# Altium PCB 5V SMPS 2.0.PcbDoc
Units mm, origin at the board's own origin, x right, y up, seen from the top; angles counter-clockwise.
Board outline 75.33 x 30.25 mm, 2 copper layers (Top Side, Bottom Layer), stack 0.979 mm thick; 28 components, 0 nets, 61 pads, 0 vias.
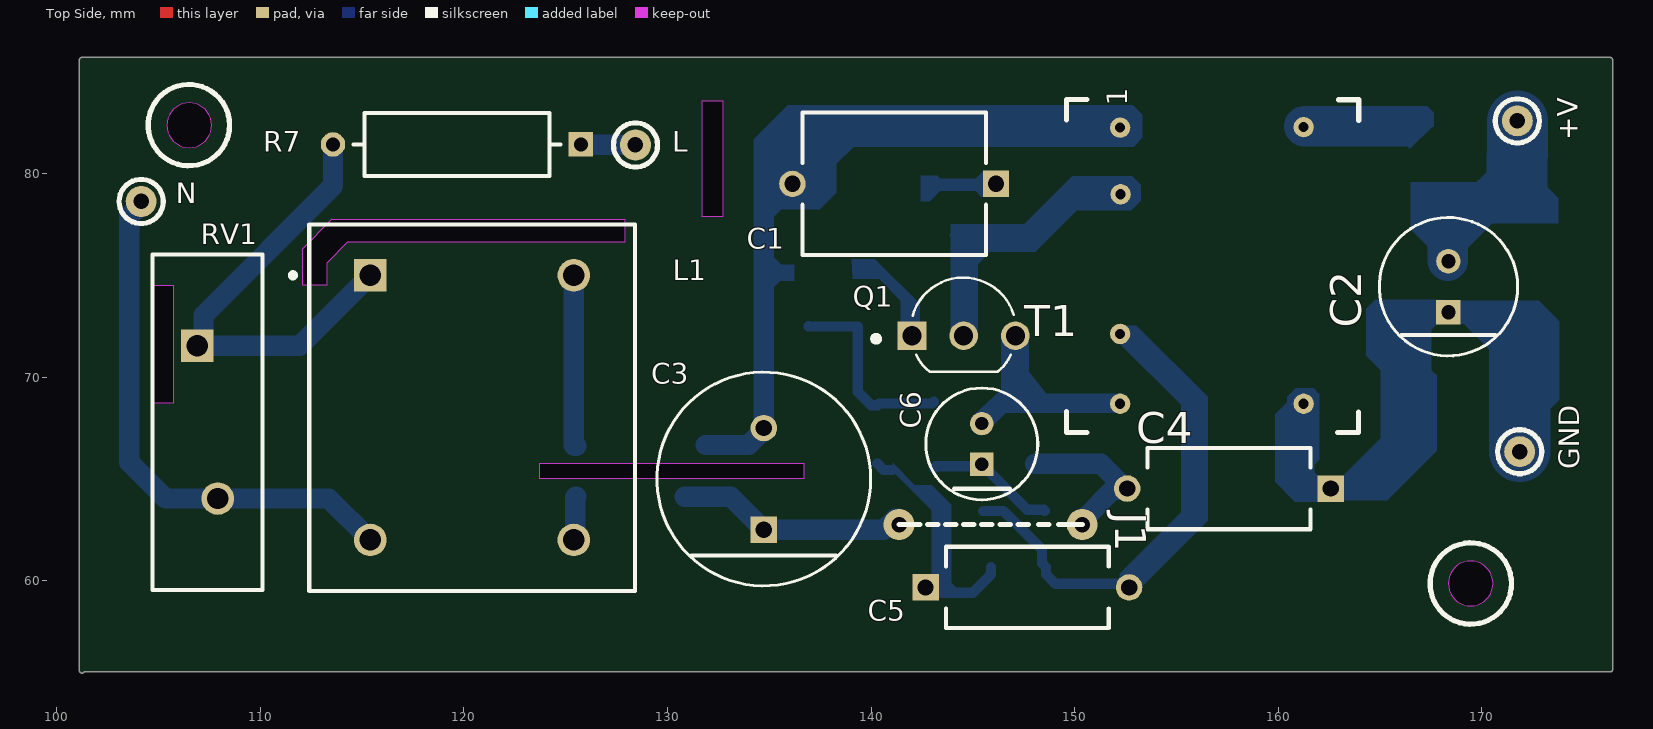
[diagram p0: Top Side view]
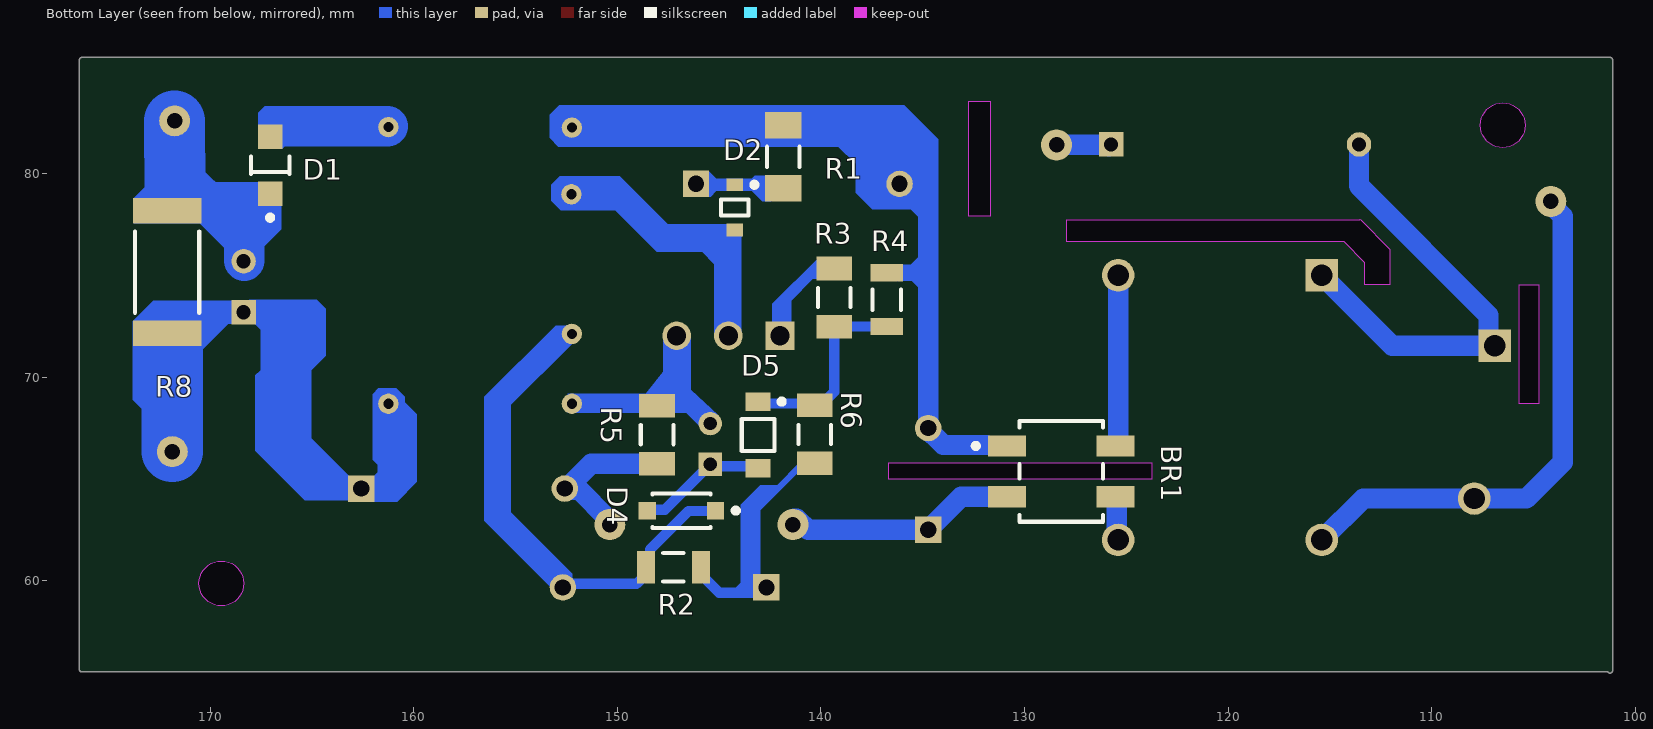
[diagram p1: Bottom Layer view, seen from below]

## Layer stack, top to bottom
Top Solder: solder mask 0.0102, Solder Resist, Dk 3.5
Top Side: signal copper (thickness not stored)
Dielectric 1: dielectric 0.9441, FR-4, Dk 4.8
Bottom Layer: signal copper 0.035
Bottom Solder: solder mask 0.0102, Solder Resist, Dk 3.5

## Board outline
101.103,55.597 101.103,85.597 cw(c101.23,85.597) 101.23,85.725 176.23,85.724 176.27,85.718 cw(c176.309,85.597) 176.437,85.597 176.437,55.658 cw(c176.309,55.658) 176.309,55.531 101.339,55.531 cw(c101.23,55.597)
cut-out: 168.358,59.877 ccw(c169.458,59.877) 169.458,58.777 ccw(c169.458,59.877) 170.558,59.877 ccw(c169.458,59.877) 169.458,60.977 ccw(c169.458,59.877)
cut-out: 105.401,82.387 ccw(c106.501,82.387) 106.501,81.287 ccw(c106.501,82.387) 107.601,82.387 ccw(c106.501,82.387) 106.501,83.487 ccw(c106.501,82.387)
cut-out: 123.721,65.787 136.687,65.787 136.687,65.018 123.721,65.018
cut-out: 127.919,77.75 113.522,77.75 113.51,77.762 112.052,76.305 112.052,74.558 113.273,74.558 113.273,75.645 114.282,76.654 127.919,76.654
cut-out: 104.703,68.738 104.703,74.536 105.708,74.536 105.708,68.728 104.704,68.728
cut-out: 131.69,83.576 131.69,77.924 132.732,77.924 132.732,83.576

## Components (designator, comment, footprint, x,y, rotation, side; value= is the part's Value field where it differs from the comment)
+V "L" Wire_point_0.5mm 171.755,82.605 r90 top
BR1 "MB10F-13" FP-MBF-MFG 128.191,65.382 r180 bottom value=8pF
C1 "2.2nF/1KV" FP-DE6_D9_T7_F10_d0_6-0_0-MFG 141.14,79.507 r180 top
C2 "220uF / 16V" FP-RAD-TH-D_6_3_0_5-L_11-MFG 168.367,74.456 r90 top
C3 "4.7uF/450V" FP-RAD-TH-D_10_0_5-L_20_2-MFG 134.731,65.009 r90 top
C4 "1.5nF / 1KV" FP-DE1_D8_T4_F10_d0_6-0_0-MFG 157.584,64.54 r180 top
C5 "1.5nF / 1KV" FP-DE1_D8_T4_F10_d0_6-0_0-MFG 147.679,59.68 r0 top
C6 "22uF / 25V" FP-RAD-TH-D_5_0_5-L_7_1-F-MFG 145.441,66.73 r90 top
D1 "PMEG3010BER,115" FP-SOD123W-MFG 167.063,80.421 r90 bottom value=170pF
D2 "M7" ONSC-SOD-323-2-477-02_V 144.236,78.35 r270 bottom
D4 "1N4148" FP-S8-V-3910_01-001-MFG 146.859,63.454 r0 bottom
D5 "9V1" ONSC-SOD-123-2-425-04_V 143.091,67.173 r270 bottom
GND "L" Wire_point_0.5mm 171.87,66.35 r90 top
J1 "7 mm long jumper" J? 141.376,62.768 r0 top
L "L" Wire_point_0.5mm 128.427,81.42 r90 top
L1 "1.8mH" FP-PLA10A_sw-MFG 120.397,68.516 r270 top
N "L" Wire_point_0.5mm 104.142,78.644 r270 top
Q1 "HLB120A" HLB12A 144.55,72.897 r0 top
R1 "150Ω" RESC3216X60X45ML10T20 141.855,80.832 r90 bottom
R2 "5.6kΩ" RESC3216X60X45LL10T20 147.247,60.671 r0 bottom
R3 "33Ω" FP-CRCW1206-e3-IPC_B 139.343,73.924 r270 bottom
R4 "1MΩ" RESC3116X65X40LL10T20 136.759,73.822 r90 bottom
R5 "33Ω" FP-CRCW1206-e3-IPC_B 148.055,67.189 r270 bottom
R6 "33Ω" FP-CRCW1206-e3-IPC_B 140.307,67.198 r90 bottom
R7 "10E" FP-CFR50J2K2-MFG 119.655,81.444 r180 top
R8 "1MΩ" RESC2512(6432)_N 172.119,75.177 r90 bottom value="1000000.00 Ohm"
RV1 "14D471K" FP-MOV-14D471K-MFG 107.404,67.798 r270 top value=516pF
T1 "3 core EE-16/5/6" Transformer 156.758,75.464 r0 top

## Footprints (in the part's own frame and the unit in brackets; to place one, negate y for a bottom-side part, rotate by r counter-clockwise, add the part's x,y. Pads: shape width x height; smd on the part's side, far side on the other; paste and mask are expansions set on the pad)
FP-CFR50J2K2-MFG [mm]
  rect 1.2x1.2 hole 0.7 paste-2539.97 mask+0: 1(-6.09,0)
  round 1.2 hole 0.7 paste-2539.97 mask+0: 2(6.09,0)
  silkscreen extent -5.09,-1.55 5.09,1.55, body extent -6.79,-1.65 6.79,1.65, height 0.25
FP-CRCW1206-e3-IPC_B [mm]
  rect 1.156x1.758 smd paste+0 mask+0: 1(-1.426,0) 2(1.426,0)
  silkscreen extent -0.47,-0.8 0.47,0.8, body extent -1.6,-0.8 1.6,0.8, height 0.6
FP-DE1_D8_T4_F10_d0_6-0_0-MFG [mm]
  rect 1.3x1.3 hole 0.8 paste-2539.97 mask+0: 1(-5,0)
  round 1.3 hole 0.8 paste-2539.97 mask+0: 2(5,0)
  silkscreen extent -4,-2 4,2, body extent -5.75,-2.1 5.75,2.1, height 0.25
FP-DE6_D9_T7_F10_d0_6-0_0-MFG [mm]
  rect 1.3x1.3 hole 0.8 paste-2539.97 mask+0: 1(-5,0)
  round 1.3 hole 0.8 paste-2539.97 mask+0: 2(5,0)
  silkscreen extent -4.5,-3.5 4.5,3.5, body extent -5.75,-3.6 5.75,3.6, height 0.25
FP-MBF-MFG [mm]
  rect 1.875x1.05 smd paste+0 mask+0: 1(-2.662,1.25) 2(2.662,1.25) 3(-2.662,-1.25) 4(2.662,-1.25)
  silkscreen extent -4.33,-2.47 2.05,2.47, body extent -3.35,-2.36 3.35,2.36, height 1.8
FP-MOV-14D471K-MFG [mm]
  rect 1.6x1.6 hole 1.05 paste-2539.97 mask+0: 1(-3.75,-0.5)
  round 1.6 hole 1.05 paste-2539.97 mask+0: 2(3.75,0.5)
  silkscreen extent -8.25,-2.7 8.25,2.7, body extent -8.35,-2.8 8.35,2.8, height 0.25
FP-PLA10A_sw-MFG [mm]
  rect 1.6x1.6 hole 1.05 paste-2539.97 mask+0: 1(-6.5,-5)
  round 1.6 hole 1.05 paste-2539.97 mask+0: 2(-6.5,5) 3(6.5,5) 4(6.5,-5)
  silkscreen extent -9,-8.92 9,8, body extent -9.1,-8.1 9.1,8.1, height 0.25
FP-RAD-TH-D_5_0_5-L_7_1-F-MFG [mm]
  rect 1.15x1.15 hole 0.65 paste-2539.97 mask+0: 1(-1,0)
  round 1.15 hole 0.65 paste-2539.97 mask+0: 2(1,0)
  silkscreen extent -2.75,-2.75 2.75,2.75, body extent -2.85,-2.85 2.85,2.85, height 0.25
FP-RAD-TH-D_6_3_0_5-L_11-MFG [mm]
  rect 1.2x1.2 hole 0.7 paste-2539.97 mask+0: 1(-1.25,0)
  round 1.2 hole 0.7 paste-2539.97 mask+0: 2(1.25,0)
  silkscreen extent -3.4,-3.4 3.4,3.4, body extent -3.5,-3.5 3.5,3.5, height 0.25
FP-RAD-TH-D_10_0_5-L_20_2-MFG [mm]
  rect 1.3x1.3 hole 0.8 paste-2539.97 mask+0: 1(-2.5,0)
  round 1.3 hole 0.8 paste-2539.97 mask+0: 2(2.5,0)
  silkscreen extent -5.25,-5.25 5.25,5.25, body extent -5.35,-5.35 5.35,5.35, height 0.25
FP-S8-V-3910_01-001-MFG [mm]
  rect 0.85x0.85 smd paste+0 mask+0: 1(-1.675,0) 2(1.675,0)
  silkscreen extent -2.8,-0.85 1.43,0.85, body extent -1.85,-0.77 1.85,0.77, height 1.35
FP-SOD123W-MFG [mm]
  rect 1.2x1.2 smd paste-1000 mask+0: 1(-1.4,0) 2(1.4,0)
  silkscreen extent -2.7,-0.95 0.43,0.95, body extent -1.75,-0.85 1.75,0.85, height 1.1
HLB12A [mm]
  rect 1.41x1.41 / inner round 1.41 / far side rect 1.41x1.41 hole 0.94: 1(-2.54,-0.853)
  round 1.41 hole 0.94: 2(0,-0.853) 3(2.54,-0.853)
  silkscreen extent -4.44,-2.62 2.47,2.01, body extent -2.83,-2.22 2.83,1.4, height 8.77
J? [mil]
  round 60 hole 30: 1(0,0) 2(354.33,0)
  silkscreen extent 0,0 354,0
ONSC-SOD-123-2-425-04_V [mm] "SOD, 2-Leads, Body 2.69x1.6mm"
  rect 0.91x1.22 smd: 1(-1.635,0) 2(1.635,0)
  silkscreen extent -1.76,-0.8 0.78,1.28, body extent -1.35,-0.8 1.35,0.8, height 1.35
ONSC-SOD-323-2-477-02_V [mm] "SOD, 2-Leads, Body 1.7x1.25mm"
  rect 0.63x0.83 smd: 1(-1.115,0) 2(1.115,0)
  silkscreen extent -1.24,-0.67 0.4,1.09, body extent -0.85,-0.63 0.85,0.63, height 1.06
RESC2512(6432)_N [mm] "Chip Resistor, Body 6.4x3.2mm, IPC Medium Density"
  rect 1.25x3.35 smd: 1(-3,0) 2(3,0)
  silkscreen extent -2,-1.57 2,1.58, body extent -3.25,-1.7 3.25,1.7, height 0.75
RESC3116X65X40LL10T20 [mm] "Chip Resistor, 2-Leads, Body 3.10x1.60mm, IPC High Density"
  rect 0.85x1.6 smd: 1(-1.325,0) 2(1.325,0)
  silkscreen extent -0.5,-0.7 0.5,0.7, body extent -1.6,-0.85 1.6,0.85, height 0.65
RESC3216X60X45LL10T20 [mm] "Chip Resistor, 2-Leads, Body 3.20x1.60mm, IPC High Density"
  rect 0.9x1.6 smd: 1(-1.35,0) 2(1.35,0)
  silkscreen extent -0.5,-0.7 0.5,0.7, body extent -1.65,-0.85 1.65,0.85, height 0.6
RESC3216X60X45ML10T20 [mm] "Chip Resistor, 2-Leads, Body 3.20x1.60mm, IPC Low Density"
  rect 1.3x1.8 smd: 1(-1.55,0) 2(1.55,0)
  silkscreen extent -0.5,-0.8 0.5,0.8, body extent -1.65,-0.85 1.65,0.85, height 0.6
Transformer [mm]
  round 1 hole 0.5: 1(-4.521,6.807) 2(-4.496,3.531) 3(-4.521,-3.327) 4(-4.521,-6.756) 5(4.496,6.833) 6(4.496,-6.756)
  silkscreen extent -7.16,-8.17 7.21,8.2, body extent -6.5,-7.52 6.5,7.5, height 13
Wire_point_0.5mm [mil]
  round 60 hole 30: 1(0,0)
  silkscreen extent -43,-43 43,43

## Part data
+V GND L N: library part Wire_point_0.5mm
BR1: library part CMP-12791-000022-1, "BRIDGE RECT 1PHASE 1KV 800MA MBF", Capacitance=8pF, Forward Current=0.5A, Manufacturer="Diodes Incorporated", Max Junction Temp=+150°C, Max Repetitive Reverse Voltage=1000V, Max Surge Forward Current=30A, Package=MBF, Peak Reverse Current=0.2uA, Temperature="-55°C to +150°C", Temperature Range Low=-55°C, Automotive=No, Category=Diode, ComponentLink2Description=Datasheet, ComponentLink2URL=https://www.diodes.com/assets/Datasheets/MB10F.pdf, Device Class L1="Discrete Semiconductors", Device Class L2=Diodes, Device Class L3="Rectifier Diodes", Digikey Description="BRIDGE RECT 1PHASE 1KV 800MA MBF", Footprint Url=https://www.diodes.com/assets/Package-Files/MBF.pdf, Height=1.8mm, Lead Free=Yes, Manufacturer Part Number=MB10F-13, Mouser Description="Diode Rectifier Bridge Single 1000V 0.8A 4-Pin Case MBF T/R", Octopart=https://octopart.com/mb10f-13-diodes+inc.-82160020, Reverse Voltage=1000V, RoHS=TRUE, Temperature Range High=+150°C
C1: library part CMP-00260-135708671-1, "DE6E3KJ222MN4A Ceramic Suppression Capacitor, 2200 pF, ± 20%, X1 / Y2, 440 V, 300 V, Radial Leaded", Capacitance=2.2nF, Case/Package=Radial, Max Operating Temperature=125°C, Min Operating Temperature=-40°C, Tolerance=20%, Voltage Rating=1kV, Height=12mm, Lifecycle Status=Production, Material=Ceramic, NexarPartId=135708671
C2: library part CMP-05427-000685-1, "Aluminum Electrolytic Capacitors (Radial Lead Type) AEC-Q200 Qualified 220uF ±20% 16V", Capacitance=220uF, Case/Package=Radial, Max Operating Temperature=105°C, Min Operating Temperature=-55°C, Package Quantity=2000, Ripple Current=180mA, Tolerance=20%, Voltage Rating=16V, Diameter=6.3mm, Height=11.2mm, Height - Seated (Max)=0.48inch, Lead Diameter=0.5mm, Lead Pitch=5mm, Lead/Base Style=Straight, Length=11.2mm, Life (Hours)=1000Hour, Mount="Through Hole", Packaging="Ammo Pack", Radiation Hardening=No, RoHS Compliant=Yes, Series=NHG, Termination=Radial, Voltage Rating (DC)=16V
C3: library part CMP-05427-000868-1, "ECA2WHG4R7 Aluminum Electrolytic Capacitors (Radial Lead Type) 4.7uF ±20% 450V", Capacitance=4.7uF, Case/Package=Radial, Dielectric Material=Aluminium, Leakage Current=10uA, Max Operating Temperature=105°C, Min Operating Temperature=-25°C, Package Quantity=200, Ripple Current=49mA, Tolerance=20%, Voltage=450V, Construction=RADIAL, Contact Plating=Tin, Diameter=10mm, Dissipation Factor=0.24%, Height=20mm, Height - Seated (Max)=0.866inch, Lead Diameter=0.6mm, Lead Free="Lead Free", Lead Pitch=5mm, Lead/Base Style=Straight, Length=20mm, Life (Hours)=2000Hour, Mount="Through Hole", Number of Pins=2, Packaging=Bulk, Radiation Hardening=No, REACH SVHC="No SVHC", Ripple Current (AC)=49mA, RoHS Compliant=Yes, Series=NHG, Termination=Radial, Voltage Rating=450V, Voltage Rating (DC)=450V
C4 C5: library part CMP-06035-063098-1, "Safety Standard Certified Lead Type Disc Ceramic Capacitors for General Purpose, 1500pF ±20%, E(JIS), 400Vac(r.m.s.), +20/-55%, Radial"
C6: library part CMP-05427-001207-1, "Aluminum Electrolytic Capacitors (Radial Lead Type) 22uF ±20% 25V", Capacitance=22uF, Case/Package=Radial, Max Operating Temperature=85°C, Min Operating Temperature=-40°C, Package Quantity=2000, Ripple Current=55mA, Tolerance=20%, Voltage Rating=25V, Diameter=5mm, Height=7mm, Height - Seated (Max)=0.315inch, Lead Pitch=2.5mm, Length=7mm, Life (Hours)=1000Hour, Mount="Through Hole", Packaging="Ammo Pack", Radiation Hardening=No, RoHS Compliant=Yes, Series=KA, Termination=Radial, Voltage Rating (DC)=25V
D1: library part CMP-14398-000004-1, "DIODE SCHOTTKY 30V 1A SOD123W", Ambient Temperature Range High=+150°C, Ambient Temperature Range Low=-55°C, Capacitance=170pF, Forward Current=1A, Manufacturer=Nexperia, Max Surge Forward Current=50A, Package=SOD123W, Peak Reverse Current=15uA, Reverse Voltage=30V, Temperature="to +150°C", Automotive=Yes, Automotive Grade="Grade 0", Category=Diode, ComponentLink2Description=Datasheet, ComponentLink2URL=https://assets.nexperia.com/documents/data-sheet/PMEG3010BER.pdf, Device Class L1="Discrete Semiconductors", Device Class L2=Diodes, Device Class L3="Schottky Diodes", Digikey Description="DIODE SCHOTTKY 30V 1A SOD123W", Footprint Url=https://assets.nexperia.com/documents/outline-drawing/SOD123W.pdf, Height=1.1mm, Lead Free=Yes, Manufacturer Part Number=PMEG3010BER,115, Max Junction Temp=+150°C, Octopart=https://octopart.com/pmeg3010ber%2C115-nexperia-78741454, RoHS=TRUE, Temperature Range High=+150°C
D2: library part CMP-1054-00003-1, "1A Vf1000V  Diode SOD-323, Pb-Free, Tape and Reel", Manufacturer="On Semiconductor", PartNumber=MMDL914T3G, ComponentLink1Description="Manufacturer URL", ComponentLink1URL=http://www.onsemi.com/, ComponentLink2Description=Datasheet, ComponentLink2URL=http://www.onsemi.com/pub_link/Collateral/MMDL914T1-D.PDF, ComponentLink3Description="Package Specification", ComponentLink3URL=http://www.onsemi.com/pub_link/Collateral/477-02.PDF.1, Configuration=Single, DatasheetVersion="Rev. 9", IF Max (A)=0.2, Mounting Technology="Surface Mount", PackageDescription="2-Pin SOD, Body 1.7 x 1.25 mm", PackageReference=SOD-323-2-477-02, PackageVersion="Rev. H, 03/2007", Packing="Tape and Reel", RoHS=TRUE, trr Max (ns)=4
D4: library part CMP-00030-46456310-1, "1N4148W-G3-08 Rectifier Diode, 1 Phase, 1 Element, 0.15A, 100V V(RRM), Silicon", Average Rectified Current=150mA, Case/Package=SOD, Forward Voltage=1.2V, Max Operating Temperature=150°C, Max Repetitive Reverse Voltage (Vrrm)=100V, Max Reverse Voltage (DC)=75V, Min Operating Temperature=-55°C, Peak Non-Repetitive Surge Current=500mA, Contact Plating=Tin, Element Configuration=Single, Forward Current=150mA, Mount="Surface Mount", NexarPartId=46456310, Number of Pins=2, Reverse Recovery Time=4ns, RoHS=Compliant, Schedule B="8541100070, 8541100070", Weight=9.412042mg
D5: library part CMP-1060-00344-1, "SZMMSZ9V1T1G Zener Voltage Regulator, 500 mW, 2-Pin SOD-123, Pb-Free, Tape and Reel", Manufacturer="On Semiconductor", PartNumber=SZMMSZ9V1T1G, ComponentLink1Description="Manufacturer URL", ComponentLink1URL=http://www.onsemi.com/, ComponentLink2Description=Datasheet, ComponentLink2URL=http://www.onsemi.com/pub_link/Collateral/MMSZ2V4T1-D.PDF, ComponentLink3Description="Package Specification", ComponentLink3URL=http://www.onsemi.com/pub_link/Collateral/425-04.PDF, DatasheetVersion="Rev. 11", Mounting Technology="Surface Mount", P Max (W)=0.5, PackageDescription="2-Pin SOD, Body 1.6 x 2.69 mm", PackageReference=SOD-123-2-425-04, PackageVersion="Rev. G, 10/2009", Packing="Tape and Reel", RoHS=Pb-Free
L1: library part CMP-06045-000735-1, "Common Mode Choke Dual 1.8mH 1.5A 0.21Ω DCR Thru-Hole Bulk", Current=1.5A, DC Resistance (DCR)=100mR, Insulation Resistance=100MR, Max Operating Temperature=120°C, Min Operating Temperature=-25°C, Package Quantity=1260, Voltage Rating=300V, Body Diameter=1.2mm, DC Current=1.5A, Depth=16mm, Height=17.5mm, Inductance=1.8mH, Lead/Base Style=Pin, Length=18mm, Max DC Current=1.5A, Military Standard=Not, Mount="Through Hole", Number of Lines=2, Number of Pins=4, Packaging=Bulk, Radiation Hardening=No, REACH SVHC="No SVHC", RMS Current (Irms)=1.5A, RoHS Compliant=Yes, Series="EMIFIL®, PLA10", Shielding=Unshielded, Termination=Radial, Voltage Rating (AC)=300V, Voltage Rating (DC)=300V, Width=16mm
Q1: "Transistor General Purpose BJT NPN 40 Volt 0.2 Amp 3-Pin TO-92 Tape And Reel", Package="TO-92-3 ON Semiconductor", Check_prices=https://www.snapeda.com/parts/2N3904TF/Fairchild+Imaging/view-part/?ref=eda, MF="Fairchild Semiconductor", MP=2N3904TF, SnapEDA_Link=https://www.snapeda.com/parts/2N3904TF/Fairchild+Imaging/view-part/?ref=snap
R1: library part CMP-2003-01811-1, "CRCW1206150KJNEA", Manufacturer="Vishay Dale", Part Number=CRCW1206150KJNEA
R2: library part CMP-2003-02302-1, Manufacturer="Vishay Dale", Part Number=CRCW12065K60FKEA
R3 R5 R6: library part CMP-02407-001891-1, "CRCW120633R0FKEA RES Thick Film, 33Ω, 1%, 0.25W, 100ppm/°C, 1206", Case Code (Imperial)=1206, Case Code (Metric)=3216, Max Operating Temperature=155°C, Max Power Dissipation=250mW, Min Operating Temperature=-55°C, Package Quantity=10, Resistance=33R, Temperature Coefficient=100ppm/°C, Tolerance=1%, Voltage Rating=200V, Case/Package=1206, Composition="Thick Film", Contact Plating=Tin, Depth=1.6mm, Features="Automotive AEC-Q200", Height=0.55mm, Lead Free="Lead Free", Length=3.2mm, Military Standard=Not, Number of Terminations=2, Packaging="Tape and Reel", Power Rating=250mW, Radiation Hardening=No, Termination=SMD/SMT, Voltage Rating (DC)=200V, Weight=0.000353oz, Width=1.6mm
R4: library part CMP-2003-04325-1, "RV1206FR-071ML", Manufacturer=Yageo, Part Number=RV1206FR-071ML
R7: library part CMP-03212-000011-1, "RES 10 OHM 5% 1/2W AXIAL", Case/Package=Axial, Max Operating Temperature=155°C, Max Power Dissipation=500mW, Min Operating Temperature=-55°C, Number of Resistors=1, Package Quantity=3000, Resistance=2.2kR, Resistance Tolerance=5%, Resistor Type="Thin Film", Temperature Coefficient=0ppm/°C, Voltage Rating=350V, Diameter=3mm, ELV=Compliant, Length=9mm, Mount=Axial, Number of Terminations=2, Packaging="Cut Tape", Power Rating=500mW, Radiation Hardening=No, REACH SVHC="No SVHC", RoHS Compliant=Yes, Series="CFR50, Neohm", Technology="CARBON FILM", Termination=Axial, Tolerance=5%, Voltage Rating (DC)=350V
R8: library part CMP-1018-00146-1, "1M 1W 5% 2512 (6432 Metric)  SMD", Case-EIA=2512, Case-Metric=6432, Power="1 W", Tolerance="5 %", Technology=SMT
RV1: library part CMP-07402-000007-1, "MOV-14D471K VARISTOR 470V 4.5KA DISC 14MM", Capacitance=516pF, Clamping Current=50A, Clamping Voltage=775V, Manufacturer="Bourns Inc.", Manufacturer Part Number=MOV-14D471K, Package=Radial, Temperature="-40°C to +105°C", Temperature Range High=+105°C, Temperature Range Low=-40°C, Varistor Voltage=423V, Voltage Rating Ac=300V, Voltage Rating Dc=385V, Voltage Tolerance=10%, Automotive=No, Category=Res, ComponentLink2Description=Datasheet, ComponentLink2URL=https://www.bourns.com/docs/product-datasheets/mov14d.pdf?sfvrsn=d6ed188_26, Device Class L1="Circuit Protection", Device Class L2=Varistors, Device Class L3=unset, Digikey Description="VARISTOR 470V 4.5KA DISC 14MM", Esd Protec Present=true, Height=20mm, Lead Free=Yes, Mouser Description="Varistors 470volts 14mm", Octopart=https://octopart.com/mov-14d471k-bourns-21388916, RoHS=TRUE
T1: library part Transformer, "Ferrite Core Transformer 3 core EE-16/5/6 500mA output 5V"

## Nets (pads, with @x,y where several pads share a name; then routed paths per layer and width w, separated by ;. In a path a pad name is that pad's centre, name@x,y a point inside that pad or via, vN(x,y) a via of type N, cw(c..) or ccw(c..) an arc to the next point about the centre after c; other vN are vias at no path point)
pads on no net: +V.1 BR1.1 BR1.2 BR1.3 BR1.4 C1.1 C1.2 C2.1 C2.2 C3.1 C3.2 C4.1 C4.2 C5.1 C5.2 C6.1 C6.2 D1.1 D1.2 D2.1 D2.2 D4.1 D4.2 D5.1 D5.2 GND.1 J1.1 J1.2 L1.1 L1.2 L1.3 L1.4 L.1 N.1 Q1.1 Q1.2 Q1.3 R1.1 R1.2 R2.1 R2.2 R3.1 R3.2 R4.1 R4.2 R5.1 R5.2 R6.1 R6.2 R7.1 R7.2 R8.1 R8.2 RV1.1 RV1.2 T1.1 T1.2 T1.3 T1.4 T1.5 T1.6
copper on no net: | length 129.2
  Bottom Layer w0.254: 141.94,72.114 142.01,72.044
  Bottom Layer w0.508: 136.935,72.52 136.957,72.498 139.343,72.498 139.343,69.287 140.006,68.624 140.307,68.624 140.399,68.716 142.999,68.716 143.091,68.808 ; 140.307,65.772 140.631,65.448 141.019,65.448 ; 142.679,59.68 142.938,59.421 144.997,59.421 145.897,60.321 145.897,60.671 ; 143.091,65.538 143.187,65.634 145.345,65.634 145.441,65.73 147.67,63.502 148.487,63.502 148.534,63.454 ; 145.498,63.437 146.506,63.437 148.401,61.543 148.401,60.867 148.597,60.671 148.597,60.321 149.06,59.857 152.679,59.857
  Bottom Layer w1: 104.142,78.644 104.142,78.502 103.559,77.919 103.559,65.839 105.35,64.048 107.904,64.048 113.365,64.048 115.397,62.016 ; 113.565,81.444 113.565,79.422 107.204,73.062 107.204,71.848 106.904,71.548 111.929,71.548 115.397,75.016 ; 125.384,62.029 125.397,62.016 125.463,62.082 125.463,64.107 125.488,64.132 125.528,64.132 ; 125.397,75.016 125.397,66.657 125.422,66.632 125.528,66.632 ; 125.845,81.344 125.745,81.444 125.757,81.432 128.415,81.432 128.427,81.42 ; 130.853,64.132 133.108,64.132 134.731,62.509 140.629,62.509 141.185,63.065 141.327,63.065 ; 131.87,66.68 133.995,66.68 134.844,67.528 ; 134.731,67.509 134.731,69.544 ; 148.055,65.763 151.28,65.763 152.503,64.54 152.584,64.54 152.527,64.482 151.886,64.482 150.469,63.065 150.327,63.065 ; 162.584,64.54 162.593,64.531 ; 168.243,76.563 168.329,76.477 ; 168.329,75.745 168.367,75.706 ; 171.87,69.41 172.003,69.543 ; 171.88,80.854 171.88,78.177 172.119,78.177
  Bottom Layer w2: 161.292,82.334 163.863,82.334 ; 168.329,75.745 168.329,76.477 168.329,76.745
  Bottom Layer w3: 171.755,80.979 171.755,82.605 ; 171.87,66.35 171.87,69.41

## Other copper
Bottom Layer:
  region: 141.064,65.799 142.156,64.708 142.992,64.708 143.952,63.748 143.952,59.902 144.308,59.546 142.992,59.546 142.992,63.474 141.019,65.448
  region: 152.224,72.546 152.255,72.515 152.255,71.627 155.231,68.652 155.231,63.364 152.224,60.357 152.224,59.465 153.047,59.465 156.548,62.966 156.548,69.039 153.041,72.546
  region: 169.449,79.29 170.249,80.09 170.249,81.017 173.189,81.017 173.23,80.976 173.23,79.29 173.759,78.761
  region: 167.827,73.768 172.8,73.768 173.814,72.754 173.814,68.891 172.558,67.636 171.11,67.636 170.378,68.368 170.378,71.385 169.13,72.633 168.382,72.633
  region: 165.039,69.355 165.039,70.348 164.328,71.059 164.328,73.367 164.775,73.815 168.077,73.815 168.077,72.883 167.531,72.337 167.531,70.346 167.784,70.093 167.784,69.355
  region: 162.636,65.145 163.169,65.145 165.041,67.018 165.039,69.355 167.784,69.355 167.784,66.385 165.365,63.966 162.73,63.966
  region: 166.519,79.588 172.976,79.588 173.781,78.784 173.759,78.761 173.759,77.577 170.53,77.577 168.82,75.868 168.82,75.778 168.005,75.778 166.508,77.275 166.508,78.862
  region: 163.472,83.253 163.534,83.316 167.332,83.316 167.645,83.002 167.645,82.325 167.574,82.325 166.473,81.224 166.352,81.345 163.643,81.345
  region: 160.451,68.781 160.451,69.059 160.857,69.465 160.862,69.46 161.741,69.46 162.024,69.176 162.024,65.957 161.77,65.703 161.77,65.344 162.024,65.09 162.024,63.888 160.823,63.888 159.85,64.861 159.85,68.181
  region: 139.104,74.848 139.045,75.815 140.192,75.815 142.39,73.617 142.39,72.566 141.466,72.566 141.466,73.761 140.416,74.812
  region: 134.23,68.346 135.223,68.825 135.223,77.889 135.597,78.263 137.489,78.263 138.293,79.067 138.293,80.486 139.145,81.338 152.911,81.338 153.337,81.763 153.337,82.899 152.864,83.372 135.904,83.372 134.23,81.697
  region: 142.444,78.652 142.444,79.919 143.252,79.919 143.41,79.761 145.151,79.761 145.522,80.132 145.522,78.883 145.423,78.883 145.144,79.162 143.41,79.162 142.896,78.648
  region: 134.658,76.456 135.58,75.534 136.225,75.534 136.225,74.714 136.196,74.743 135.549,74.743 134.682,73.876
  region: 146.396,69.383 145.043,68.128 145.761,67.41 146.615,68.264 152.451,68.264 152.451,69.198 148.618,69.198 147.76,70.276 147.76,72.044 146.396,72.044
  region: 152.836,79.88 153.24,79.476 153.24,78.684 152.776,78.22 150.103,78.22 148.061,76.178 145.838,76.178 145.231,75.571 145.231,72.044 143.927,72.044 143.927,76.89 143.837,76.98 143.927,77.069 143.927,77.518 144.615,77.518 144.63,77.533 147.53,77.533 149.876,79.88 151.954,79.88

## Silkscreen, mask and mechanical layers (free items; w line width, h text height)
Top Overlay:
  circle w0.254: c169.467,59.873 r2
  circle w0.254: c106.482,82.395 r2
Mechanical 1:
  circle w0.254: c169.458,59.877 r1.1
  circle w0.254: c106.501,82.387 r1.1
  lines w0.254: 101.23,55.597 101.23,85.597 176.23,85.597 ; 101.23,55.658 176.309,55.658 176.309,85.597

## Dimensions
176.23,85.597 to 176.309,55.658 on Mechanical 1
101.23,85.597 to 176.308,86.1 on Mechanical 1

## Text inside footprints (layer, text, board x,y; h text height)
T1: Top Overlay "1" at 152.592,83.338 h1 r90